# Altium PCB TC-temp-logger-base.PcbDoc (part 4 of 5)
Units mil, origin at the board's own origin, x right, y up, seen from the top; angles counter-clockwise.
Board outline 6370.08 x 6889.76 mil, 4 copper layers (Top Layer, Layer 2, Layer 1, Bottom Layer), stack 61.581 mil thick; 216 components, 163 nets, 792 pads, 3713 vias.
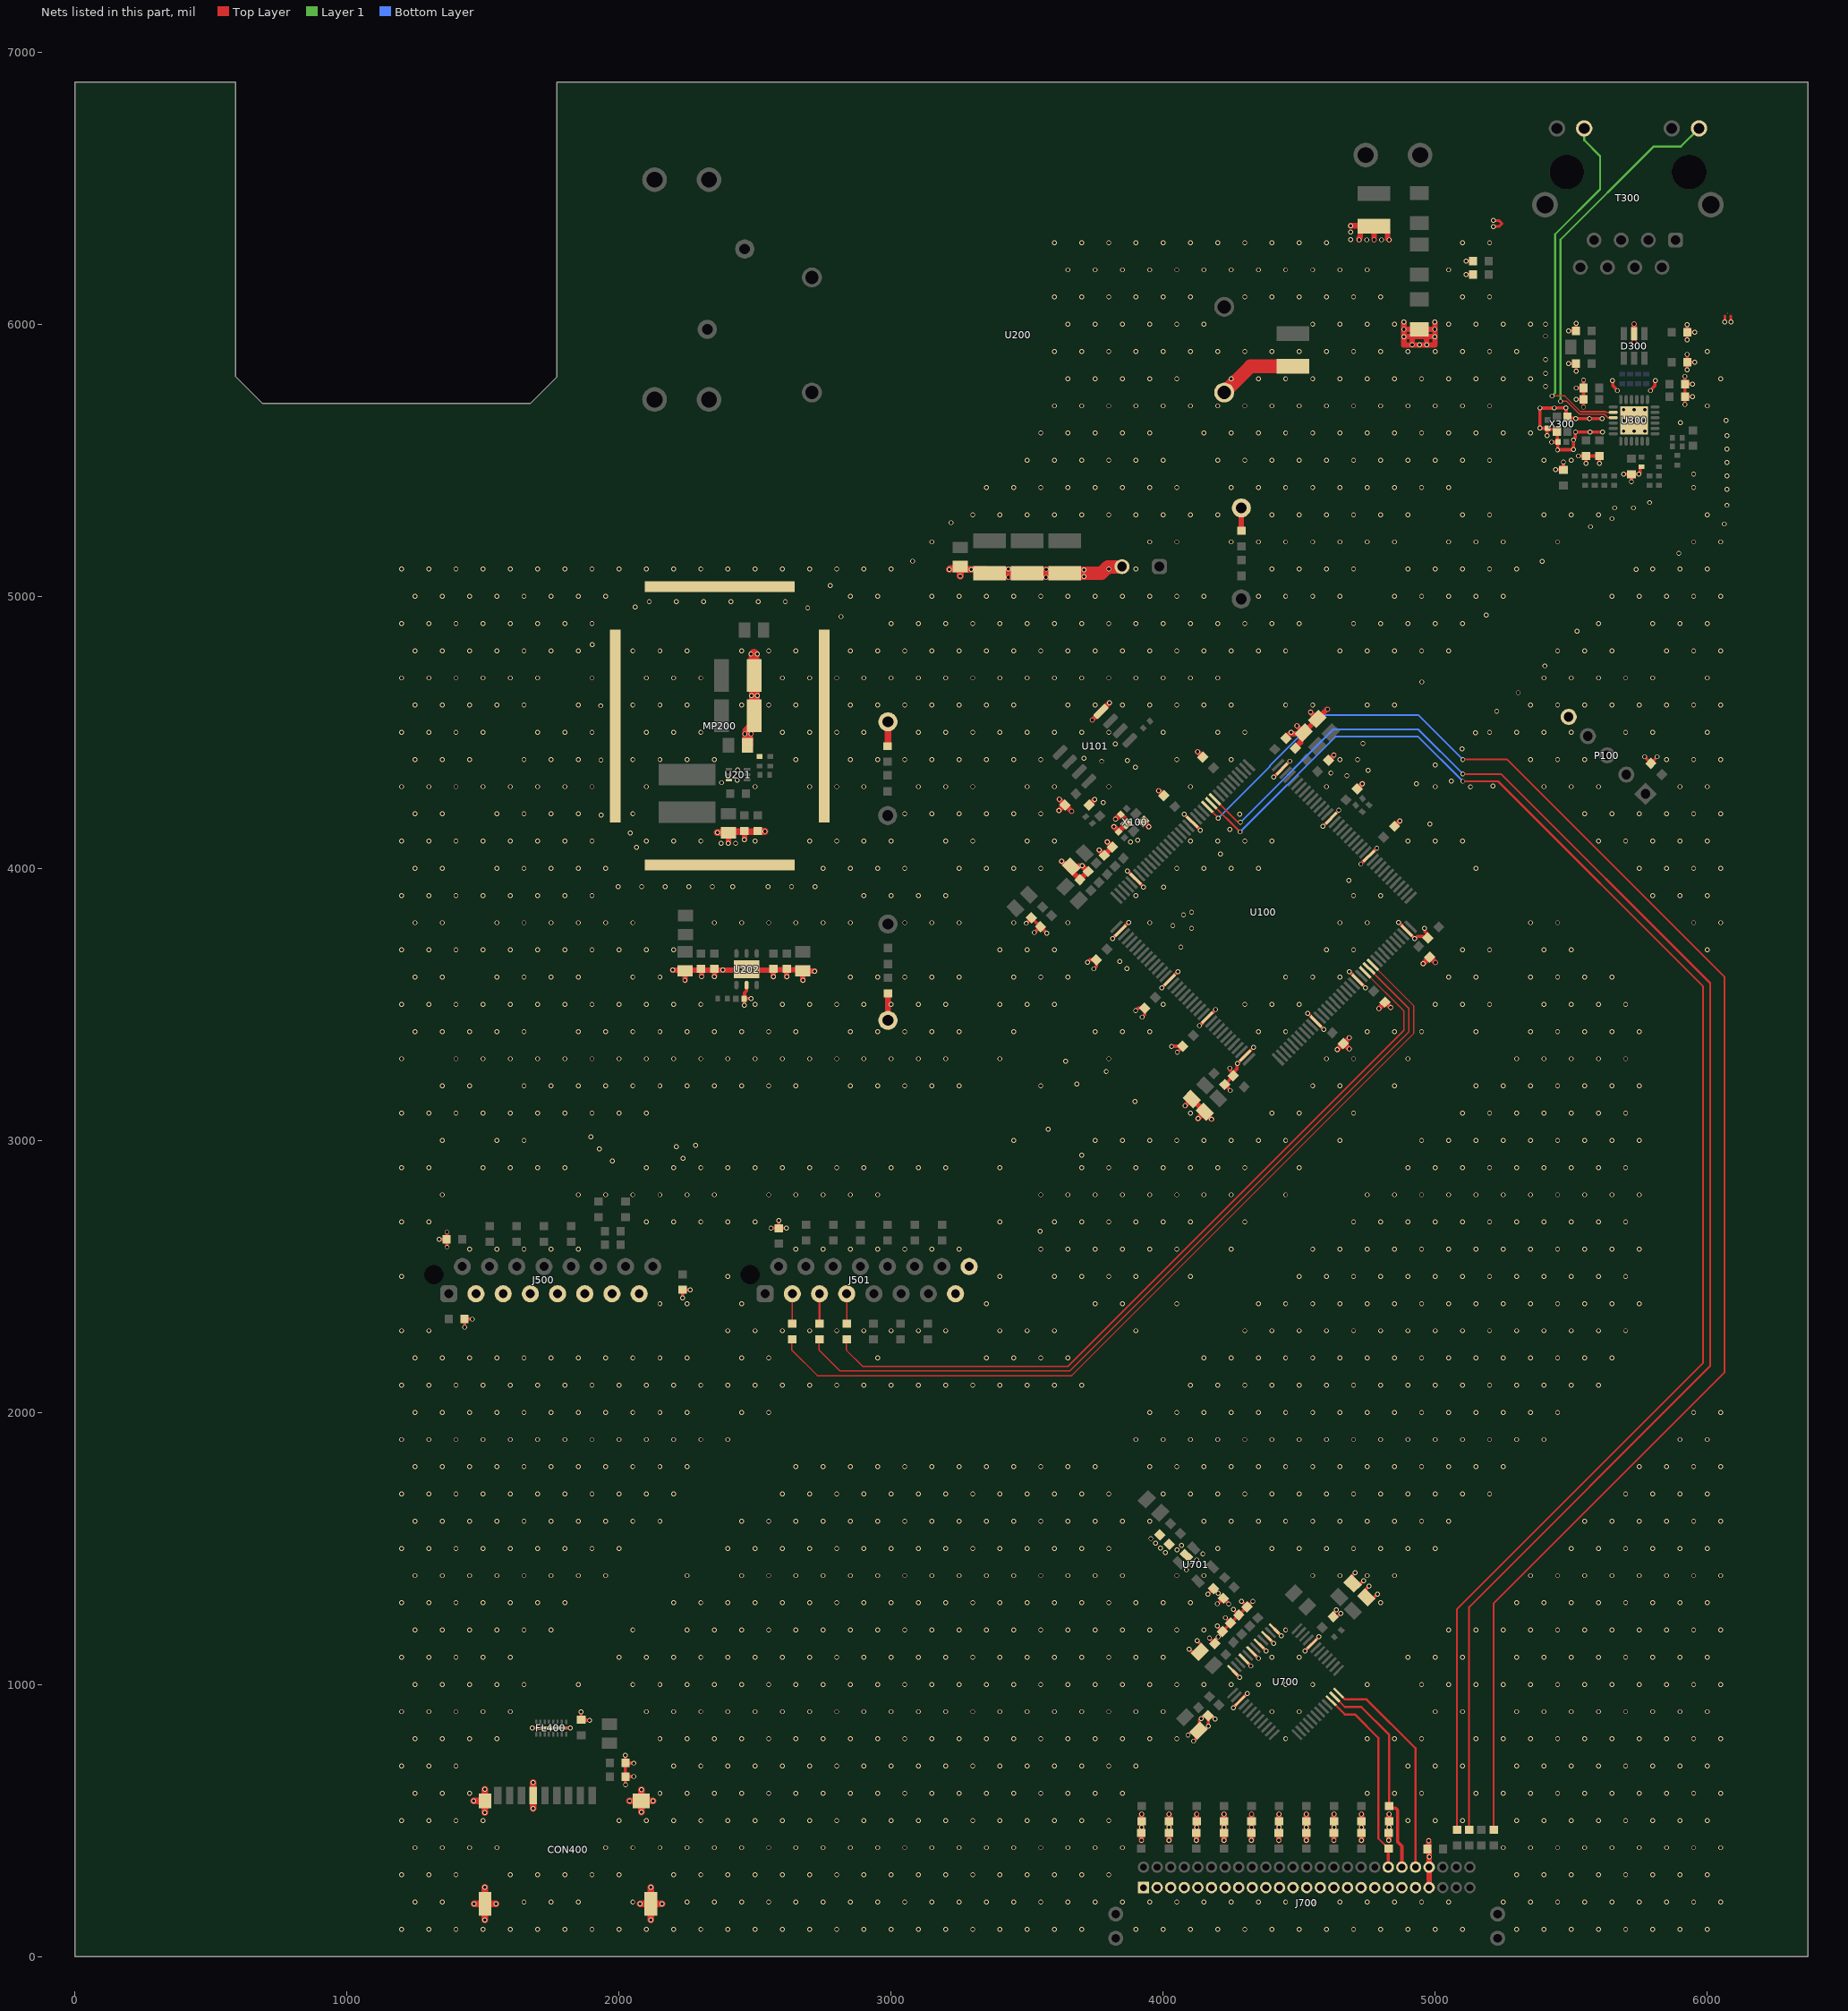
[diagram p5: the nets of this part, all layers, seen from the top]

## Via types
v1: diameter 17.72, hole 11.81, Top Layer to Bottom Layer, tented both sides, 3702 vias
v2: diameter 23.62, hole 11.81, Top Layer to Bottom Layer, 9 vias
v3: diameter 19.68, hole 7.87, Top Layer to Bottom Layer, tented both sides, 2 vias

## Nets (pads, with @x,y where several pads share a name; then routed paths per layer and width w, separated by ;. In a path a pad name is that pad's centre, name@x,y a point inside that pad or via, vN(x,y) a via of type N, cw(c..) or ccw(c..) an arc to the next point about the centre after c; other vN are vias at no path point) (continued)
CH19_7: C709.1 J700.38 U700.34 | length 721.2
  Top Layer w8: U700.34@4617.03,940.4 4667.67,889.76 4704.72,889.76 4791.34,803.15 4791.34,433.61 4827.56,397.39 C709.1@4827.56,394.54
  Top Layer w12: J700.38@4827.56,328.15 C709.1@4827.56,394.54
CH20_7: C719.1 J700.40 U700.35 | length 779.5
  Top Layer w8: U700.35@4630.95,954.32 4667.95,917.32 4728.35,917.32 4830,815.67 C719.1@4830,553.54
  Top Layer w12: C719.1@4822.89,551.18 4828.28,545.79 4854.21,545.79 4862.2,537.8 4862.2,421.26 4877.56,405.91 J700.40@4877.56,328.15
COM_7: J700.42 U700.36 | length 803.9
  Top Layer w8: U700.36@4644.87,968.24 4668.23,944.88 4748.03,944.88 4927.56,765.35 J700.42@4927.56,328.15
ENC-BUT: R516.1 U100.98 | length 3201.2
  Top Layer w5: R516.1@2634.84,2268.7 2634.84,2229.33 2728.88,2135.29 3663.69,2135.29 4921.71,3393.31 4921.71,3494.49 U100.98@4770.53,3645.66
ENC-BUT_CON_6: J501.3 R516.2 | length 110.3
  Top Layer w5: R516.2@2636.59,2325.79 J501.3@2636.59,2436.05
ENC-CH1: R514.1 U100.96 | length 2897.9
  Top Layer w5: R514.1@2834.84,2268.7 2834.84,2229.33 2894.88,2169.29 3649.61,2169.29 4884.61,3404.3 4884.61,3475.9 U100.96@4742.69,3617.82
ENC-CH1_CON_6: J501.7 R514.2 | length 110.3
  Top Layer w5: R514.2@2836.59,2325.79 J501.7@2836.59,2436.05
ENC-CH2: R515.1 U100.97 | length 3049.7
  Top Layer w5: R515.1@2734.84,2268.7 2734.84,2229.33 2811.88,2152.29 3656.65,2152.29 4903.33,3398.98 4903.33,3485.02 U100.97@4756.61,3631.74
ENC-CH2_CON_6: J501.5 R515.2 | length 111
  Top Layer w6.66: R515.2@2734.84,2325.79 2736.59,2327.53 J501.5@2736.59,2436.05
ETH_LED1_4: T300.9 U300.3 | length 1491.7
  Top Layer w5: v1(5460.63,5716.54) 5483.34,5716.54 5530.58,5669.29 5622.05,5669.29 5634.79,5656.55 U300.3@5654.53,5656.5 U300.3@5654.53,5656.5
  Layer 1 w8: v1(5460.63,5716.54) 5460.63,6311.02 5803.15,6653.54 5903.15,6653.54 T300.9@5969.69,6720.08
ETH_LED2_4: T300.11 U300.2 | length 1331.8
  Top Layer w5: v1(5429.13,5736.22) 5476.38,5736.22 5533.98,5678.62 5625.45,5678.62 5627.89,5676.18 U300.2@5654.53,5676.18
  Layer 1 w7.99: v1(5429.13,5736.22) 5440.94,5748.03 5440.94,6330.71 5606.3,6496.06 5606.3,6618.11 5547.64,6676.77 T300.11@5547.64,6720.08
GND: C100.2 C101.2 C102.2 C103.2 C104.2 C105.2 C106.2 C107.2 C108.2 C109.2 C110.2 C111.2 C112.2 C113.2 C114.2 C115.2 C116.2 C117.2 C118.2 C119.2 C120.2 C121.2 C122.2 C123.2 C124.2 C125.2 C126.2 C127.2 C128.2 C129.2 C130.2 C200.2 C201.2 C202.2 C203.2 C204.2 C206.2 C207.2 C208.2 C209.2 C210.2 C211.2 C212.2 C213.2 C214.2 C215.2 C216.2 C217.2 C218.2 C219.2 C300.2 C301.2 C302.2 C303.2 C304.2 C305.2 C306.2 C307.2 C308.2 C309.2 C310.2 C311.2 C312.2 C400.2 C401.2 C402.2 C403.2 C500.2 C501.2 C502.2 C503.2 C700.2 C701.2 C702.2 C703.2 C704.2 C705.2 C706.2 C707.2 C708.2 C709.2 C710.2 C711.2 C712.2 C713.2 C714.2 C715.2 C716.2 C717.2 C718.2 C719.2 C721.2 C722.2 C723.2 C724.2 C725.2 C726.2 C727.2 C728.2 C729.2 C730.2 C731.2 C732.2 C733.2 C734.2 C735.2 C736.2 CON400.6 CON400.10 CON400.11 CON400.12 CON400.13 D300.2 FL400.17 J500.3 J500.5 J500.7 J500.9 J500.11 J500.13 J500.15 J501.15 J501.16 J700.01 J700.03 J700.05 J700.07 J700.09 J700.11 J700.13 J700.15 J700.17 J700.19 J700.21 J700.23 J700.25 J700.27 J700.29 J700.31 J700.33 J700.35 J700.37 J700.39 J700.41 J700.43 J700.44 JP300.2 JP301.2 MP200.1 P100.5 R101.1 R200.1 R201.1 R202.1 R205.1 R310.1 R312.1 R313.1 R318.1 R321.2 TP201.1 TP203.1 TP205.1 U100.16 U100.31 U100.38 U100.51 U100.61 U100.71 U100.83 U100.94 U100.107 U100.120 U100.130 U100.143 U101.4 U200.VNEG U201.3 U202.2 U202.7 U300.25 U700.1 U700.3 U700.5 U700.7 U700.9 U700.12 U700.15 U700.44 U701.2 X100.2 X100.4 X300.2 X300.4 | length 13023.6
  Top Layer w10: v1(5213.58,6358.27) 5215.06,6359.74 5235.74,6359.74 JP301.2@5246.06,6370.07 5235.72,6380.41 5216.04,6380.41 v1@5214.57,6381.89 ; v1@6065.45,6010.33 6065.45,6030.01 ; v1@6086.12,6009.35 6086.12,6030.03
  Top Layer w12: v1(1338.58,2635.83) C501.2@1366.14,2635.83 ; v1(1367.13,2607.28) v1(1367.13,2663.39) ; C500.2@1431.1,2343.5 C500.2@1431.59,2343.01 ; v1(1432.09,2312.99) 1431.59,2313.48 C500.2@1431.59,2343.01 ; v1(1460.63,2342.52) 1460.14,2343.01 C500.2@1431.59,2343.01 ; v1(1679.96,839.57) FL400.17@1749.84,839.57 v1(1819.72,839.57) ; v1(1860.24,899.61) 1860.39,899.45 1860.39,869.96 C400.2@1860.55,869.8 1861.4,868.96 1890.89,868.96 v1(1891.73,868.11) ; v1(2022.64,740.16) 2022.64,711.26 2022.87,711.02 C401.2@2022.87,661.26 ; C402.2@2022.87,711.26 2023.19,710.94 2053.82,710.94 v1(2054.13,710.63) ; v1(2023.62,630.91) 2023.25,631.28 2023.25,658.92 2022.87,659.29 C401.2@2022.87,661.26 ; v1(2054.13,661.42) 2054.06,661.34 2022.95,661.34 C401.2@2022.87,661.26 ; v1(2233.27,2421.26) C502.2@2233.27,2450.79 v1(2261.81,2450.79) ; v1(2460.63,3496.06) 2460.24,3496.46 2460.24,3520.28 C218.2@2459.84,3520.67 ; U202.2@2468.5,3570.87 2468.5,3550.05 2460.84,3542.39 2460.84,3521.67 C218.2@2459.84,3520.67 ; v1(2485.24,3520.67) C218.2@2459.84,3520.67 ; v1(2558.07,2677.17) C503.2@2586.59,2677.17 v1(2615.16,2677.17) ; C503.2@2586.59,2677.17 v1(2586.61,2704.72) ; v1(3496.06,3798.23) 3496.32,3798.23 3515.86,3817.77 C110.2@3516.12,3817.77 3516.12,3817.66 C111.2@3548.56,3785.21 ; v1(3526.57,3763.78) 3526.85,3763.78 3548.28,3785.21 C111.2@3548.56,3785.21 ; v1(3572.83,3760.83) 3572.83,3760.94 C111.2@3548.56,3785.21 ; v1(3721.38,3654.31) 3730.72,3663.64 3750.5,3663.64 C122.2@3751.19,3662.95 ; v1(3745.09,3630.6) 3754.43,3639.93 3754.43,3659.71 C122.2@3753.73,3660.41 ; v1(3813.58,3741.97) 3813.58,3742.05 U100.38@3842.47,3770.94 ; U100.38@3842.38,3770.94 U100.38@3842.47,3770.94 ; v1(3868.77,3990.48) 3868.85,3990.48 U100.31@3898.06,3961.27 ; v1@3872.28,3800.75 U100.38@3842.47,3770.94 ; v1(3872.64,3801.03) v1(3872.64,3801.03) U100.38@3842.47,3770.94 ; U100.31@3898.06,3961.36 U100.31@3898.06,3961.27 ; v1(3898.88,3476.81) 3908.22,3486.14 3928,3486.14 C120.2@3928.69,3485.45 ; v1(3922.59,3453.1) 3931.93,3462.43 3931.93,3482.21 C120.2@3931.23,3482.91 ; v1(3928.15,3931.1) 3928.15,3931.19 U100.31@3898.06,3961.27 ; v1(3994.54,3561.02) 3994.54,3561.1 U100.51@4023.42,3589.99 ; U100.51@4023.34,3589.99 U100.51@4023.42,3589.99 ; v1(4030.51,3345.47) 4031.18,3346.14 4070.54,3346.14 C119.2@4071.23,3345.45 ; v1(4051.84,3323.51) C119.2@4071.23,3342.91 ; v1@4053.23,3619.8 U100.51@4023.42,3589.99 ; v1(4053.59,3620.07) 4053.51,3620.07 U100.51@4023.42,3589.99 ; v1(4077.37,4199.09) 4077.64,4199.09 4106.67,4170.06 U100.16@4106.85,4170.15 ; v1(4091.18,813.26) 4091.55,813.26 4108.54,830.25 C726.2@4129.75,830.25 ; v1(4095.47,1129.92) 4109.84,1115.55 4131.05,1115.55 C723.2@4135.25,1119.75 4138.38,1122.88 4138.38,1144.1 4139.85,1145.56 v1(4125,1160.43) ; U100.16@4106.85,4170.15 U100.16@4106.85,4170.15 ; v1(4111.98,791.46) 4129.75,809.23 C726.2@4129.75,830.25 ; C726.2@4132.66,834.71 4132.66,867.57 v1@4138.23,873.14 ; v1(4133.73,3421.82) 4133.73,3421.91 U100.61@4162.61,3450.79 ; v1(4136.94,4139.89) 4136.94,4139.98 U100.16@4106.85,4170.15 ; v1(4139.92,874.83) 4141.46,874.83 4151.94,885.3 4159.5,885.3 4159.99,884.82 C725.2@4164.82,884.82 4176.77,884.82 4188.87,872.71 v1(4190.42,872.71) ; U100.61@4162.53,3450.79 U100.61@4162.61,3450.79 ; v1@4164.95,1331.8 C729.2@4184.49,1351.34 ; C725.2@4165.51,884.12 4165.51,847.32 v1(4166.5,846.33) 4150.43,830.25 C726.2@4129.75,830.25 ; v1(4170.28,1170.49) 4170.28,1170.11 C724.2@4189.82,1150.57 ; C729.2@4185.25,1352.2 C730.2@4220.61,1316.84 ; C724.2@4189.82,1150.18 C724.2@4189.82,1150.57 ; v1@4192.42,3480.6 U100.61@4162.61,3450.79 ; v1(4192.78,3480.88) 4192.7,3480.88 U100.61@4162.61,3450.79 ; v1@4198.39,1214.57 C732.2@4217.93,1195.03 ; v1@4200.3,1296.45 C730.2@4219.84,1315.99 ; C730.2@4221.46,1316.07 v1@4241,1296.53 ; v1@4228.39,1244.57 C733.2@4247.93,1225.03 ; v1(4244.91,3265.58) 4246.01,3264.49 4246.01,3256.31 C109.2@4257.38,3244.94 ; v1(4246.06,3183.07) 4246.06,3184.53 4226.6,3203.99 C103.2@4226.6,3205.45 4226.6,3205.81 4257.38,3236.59 4257.38,3249.35 4271.83,3263.8 4271.83,3281.54 v1(4272.92,3282.63) 4272.92,3282.71 U100.71@4301.81,3311.6 ; U700.12@4256.08,1051.44 v1(4281.54,1026.02) ; v1@4257.67,915.1 U700.15@4282.97,940.4 ; v1@4258.39,1274.57 C734.2@4277.93,1255.03 ; U700.15@4283.29,941.36 v1(4308.7,966.82) ; v1(4288.39,1306.1) 4288.39,1305.33 4307.93,1285.79 C735.2@4307.93,1285.03 ; U700.9@4297.24,1093.2 v1(4322.7,1067.78) ; U100.71@4301.73,3311.6 U100.71@4301.81,3311.6 ; U700.7@4324.13,1121.36 U700.7@4324.73,1121.36 ; U700.7@4325.08,1121.04 v1(4350.54,1095.62) ; v1(4329.72,1305.12) 4328.87,1305.12 4308.78,1285.03 C735.2@4307.93,1285.03 ; v1(4331.98,3341.69) 4331.9,3341.69 U100.71@4301.81,3311.6 ; U700.5@4352.92,1148.88 v1@4378.34,1123.46 ; U700.3@4380.76,1176.71 v1(4406.22,1151.3) ; v1(4406.21,4334.93) 4406.29,4334.93 U100.143@4436.38,4365.02 ; v1@4406.57,4335.21 U100.143@4436.38,4365.02 ; U700.1@4407.94,1204.57 4408.62,1204.57 v1@4434.02,1179.13 ; U100.143@4436.47,4365.02 U100.143@4436.38,4365.02 ; v1(4465.27,4393.99) 4465.27,4393.9 U100.143@4436.38,4365.02 ; v1(4521.7,1123.38) U700.44@4547.12,1148.84 ; v1(4531.65,3467.13) 4531.65,3467.04 U100.83@4561.74,3436.96 ; v1@4531.93,3466.76 U100.83@4561.74,3436.96 ; U700.44@4547.44,1149.79 v1@4572.73,1175.09 ; U100.83@4561.74,3436.87 U100.83@4561.74,3436.96 ; v1(4586.57,4154.57) 4587.25,4154.57 4616.75,4184.07 U100.130@4617.42,4184.07 ; v1(4590.71,3408.07) 4590.62,3408.07 U100.83@4561.74,3436.96 ; U100.130@4633.3,4200.62 4645.63,4212.95 v1(4645.63,4213.62) ; v1(4636.81,1274.61) 4636.81,1273.06 4625.03,1261.27 C736.2@4625.03,1249.12 4625.72,1248.42 4638.12,1248.42 4638.81,1249.12 4639.41,1249.12 4651.12,1260.83 v1(4652.56,1260.83) ; v1(4684.77,3620.24) v1(4684.77,3620.24) U100.94@4714.85,3590.07 ; v1@4685.04,3619.88 U100.94@4714.85,3590.07 ; C721.2@4691.44,1395.99 v1(4705.81,1410.36) ; U100.94@4714.85,3589.99 U100.94@4714.85,3590.07 ; C721.2@4721.45,1365.98 v1(4736.32,1380.83) ; v1(4726.36,4015.48) v1(4726.36,4015.48) U100.120@4756.53,4045.57 ; v1@4726.72,4015.76 U100.120@4756.53,4045.57 ; C722.2@4742.43,1346.97 v1(4756.8,1361.34) ; v1(4743.82,3561.18) 4743.74,3561.18 U100.94@4714.85,3590.07 ; U100.120@4756.61,4045.57 U100.120@4756.53,4045.57 ; C722.2@4772.43,1316.97 v1(4787.31,1331.82) ; v1(4785.41,4074.53) v1(4785.41,4074.53) U100.120@4756.53,4045.57 ; v1(4865.72,3801.19) 4865.72,3801.11 U100.107@4895.81,3771.02 ; v1@4866,3800.83 U100.107@4895.81,3771.02 ; U100.107@4895.81,3770.94 U100.107@4895.81,3771.02 ; v1(4960.63,3779.53) 4961.72,3778.43 4961.72,3767.71 4972.95,3756.48 C127.2@4972.95,3744.09 4960.55,3744.09 4954.62,3750.02 4934.2,3750.02 4926.32,3742.14 4924.69,3742.14 U100.107@4895.81,3771.02 ; v1(5114.17,6182.87) R313.1@5139.76,6182.87 ; v1(5114.17,6232.28) 5114.17,6232.48 R312.1@5139.76,6232.48 ; v1(5384.84,5691.93) v1(5384.84,5618.11) 5385.16,5617.8 C311.2@5412.48,5617.8 ; v1@5385.33,5691.44 5385.83,5691.93 v1(5437.01,5691.93) 5437.5,5692.42 5479.82,5692.42 v1(5480.31,5692.91) ; v1(5411.53,5590.66) 5411.53,5613.24 5442.03,5613.24 X300.2@5447.54,5607.74 5449.46,5605.82 C310.2@5449.46,5569.21 ; v1(5427.13,5566.89) 5447.14,5566.89 5450.59,5563.44 5450.59,5539.17 v1@5450.3,5538.88 ; v1(5442.91,5465.55) C403.2@5470.47,5465.55 ; v1(5449.8,5538.39) v1@5450.3,5538.88 ; C403.2@5471.46,5464.57 C403.2@5470.47,5465.55 ; v1(5471.46,5494.09) 5471.46,5466.54 C403.2@5470.47,5465.55 ; v1@5479.33,5691.93 5479.75,5691.93 5481.41,5690.27 5481.41,5662.45 X300.4@5485.93,5657.93 ; X300.4@5489.22,5654.64 5489.71,5654.14 5515.64,5654.14 v1(5516.73,5653.05) ; v1(5490.39,5855.71) C301.2@5517.8,5855.71 v1(5517.8,5827.4) ; v1(5490.39,5975.71) C308.2@5517.8,5975.71 v1(5517.8,6004.02) ; v1@5514.65,5605.21 5514.65,5583.13 5507.87,5576.35 v1(5507.87,5574.8) v1(5507.87,5539.37) 5507.38,5538.88 v1@5450.3,5538.88 ; v1(5515.75,5604.33) v1(5615.16,5604.33) ; v1@5516.98,5653.3 5566.68,5653.3 v1(5566.93,5653.05) ; v1(5517.87,5723.42) C305.2@5545.28,5723.42 ; v1(5517.87,5765.71) R318.1@5545.28,5765.71 ; v1(5525.83,5515.75) C303.2@5554.13,5515.75 ; v1(5545.28,5695.12) C305.2@5545.28,5723.42 ; v1(5545.28,5794.02) R318.1@5545.28,5765.71 ; v1(5554.13,5488.35) C303.2@5554.13,5515.75 ; v1@5567.18,5653.3 5567.42,5653.05 v1(5614.17,5653.05) ; v1(5603.35,5488.35) C302.2@5603.35,5515.75 C303.2@5554.13,5515.75 ; v1(5651.57,5792.32) 5652.67,5791.23 5652.67,5774.08 5669.29,5757.45 v1(5669.29,5755.91) ; v1(5693.15,5448.82) C304.2@5721.46,5448.82 ; v1(5721.46,5421.42) C304.2@5721.46,5448.82 ; R310.1@5757.8,5476.38 5755.83,5476.38 5752.97,5473.52 5752.97,5454.55 5748.78,5450.37 v1(5748.78,5448.82) C304.2@5721.46,5448.82 ; v1(5769.69,4410.43) 5769.69,4409.45 C130.2@5792.81,4386.32 ; v1(5791.34,5755.91) 5791.34,5757.45 5807.96,5774.08 5807.96,5792.21 v1(5809.06,5793.31) ; C130.2@5792.81,4385.34 C130.2@5792.81,4386.32 ; v1(5815.94,4410.43) 5815.94,4409.45 C130.2@5792.81,4386.32 ; v1(5918.31,5704.96) C306.2@5918.31,5733.27 ; v1(5918.31,5808.7) C307.2@5918.31,5780.39 ; v1(5926.34,5832.4) C300.2@5926.34,5860.71 ; v1(5926.34,5889.02) C300.2@5926.34,5860.71 ; v1(5926.34,5942.4) C309.2@5926.34,5970.71 ; v1(5926.34,5999.02) C309.2@5926.34,5970.71 ; v1(5945.71,5733.27) C306.2@5918.31,5733.27 ; v1(5945.71,5780.39) C307.2@5918.31,5780.39 ; v1(5953.74,5860.71) C300.2@5926.34,5860.71 ; v1(5953.74,5970.71) C309.2@5926.34,5970.71 ; C724.2@4189.82,1150.57 4189.82,1162.58 4217.93,1190.69 C732.2@4217.93,1195.03 ; C732.2@4217.93,1195.03 C733.2@4247.93,1225.03 ; C733.2@4247.93,1225.03 C734.2@4277.93,1255.03 ; C734.2@4277.93,1255.03 C735.2@4307.93,1285.03 ; C305.2@5545.28,5723.42 R318.1@5545.28,5765.71 ; C306.2@5918.31,5733.27 C307.2@5918.31,5780.39
  Top Layer w20: v1(2196.85,3625.98) C214.2@2303.15,3625.98 ; v1(2242.13,3588.46) C212.2@2242.13,3623.46 ; C214.2@2301.18,3629.92 2303.15,3627.95 C214.2@2303.15,3625.98 ; v1(2303.15,3602.36) C214.2@2303.15,3625.98 ; v1(2350.39,3602.36) C213.2@2350.39,3625.98 ; C213.2@2350.39,3629.92 C213.2@2350.39,3625.98 ; v1(2401.57,4092.52) C211.2@2401.57,4130.79 C211.2@2405.77,4134.98 ; v1(2460.64,4105.74) 2460.64,4134.98 C210.2@2460.63,4137.24 ; v1(2566.93,3601.38) C215.2@2566.93,3629.92 ; v1(2616.14,3601.38) C216.2@2616.14,3626.69 ; C216.2@2616.14,3629.92 C216.2@2616.14,3626.69 ; v1(2675.2,3588.46) C217.2@2675.2,3623.46 ; v1(2718.5,3622.05) 2676.61,3622.05 C217.2@2675.2,3623.46 ; TP205.1@2988.19,3440.94 R202.1@2988.19,3540.35 ; v1(3616.14,4212.6) 3636.67,4233.13 C116.2@3638.91,4233.13 ; v1(3618.11,4253.94) 3662.4,4209.65 v1(3663.39,4209.65) ; v1(3626.2,4025.97) 3626.43,4025.97 3654.08,3998.31 C113.2@3693.91,3958.49 C112.2@3723.91,3988.49 3723.14,3988.49 v1(3702.37,4009.26) 3689.79,4009.26 3682.02,4001.49 3666.46,4001.49 C115.2@3661.87,4006.08 ; C108.2@3727.35,4232.78 3727.86,4232.78 v1(3748.03,4252.95) ; v1(3739.17,4545.28) v1(3802.17,4608.27) ; v1(3764.76,4066.93) C114.2@3783.11,4048.58 ; C114.2@3783.11,4047.69 C114.2@3783.11,4048.58 ; v1(3794.29,4097.44) 3813.11,4078.62 C129.2@3813.11,4077.69 3784,4048.58 C114.2@3783.11,4048.58 ; v1(3818.9,4153.54) 3818.9,4152.52 C125.2@3836.64,4134.77 ; v1(3824.8,4181.1) 3825.82,4181.1 3843.07,4198.36 C126.2@3843.96,4197.47 ; C125.2@3836.09,4133.88 3836.64,4134.44 C125.2@3836.64,4134.77 ; C126.2@3843.96,4197.8 C126.2@3843.96,4197.47 ; v1(3920,426.66) 3920.53,427.19 v1(3920.53,475.13) C710.2@3920.53,496.46 v1(3920.53,523.34) ; X100.4@3927.12,4173.03 3927.12,4172.29 v1(3946.85,4152.56) ; v1(3983.27,4285.43) 4001.47,4267.23 C128.2@4002.45,4267.23 ; v1(4021.05,426.66) 4021.58,427.19 v1(4021.58,475.13) C711.2@4021.58,496.46 v1(4021.58,523.34) ; C119.2@4071.23,3342.91 C119.2@4071.23,3345.45 ; v1(4080.73,3127.34) C105.2@4105.48,3152.09 ; C105.2@4105.48,3153.38 C105.2@4105.48,3152.09 ; v1(4122.11,426.66) 4122.63,427.19 v1(4122.63,475.13) C712.2@4122.63,496.46 v1(4122.63,523.34) ; v1(4125.99,4428.58) 4145.17,4409.4 C106.2@4145.17,4408.96 ; v1(4128.08,3079.99) C104.2@4152.83,3104.74 4152.83,3103.08 v1(4178.15,3077.76) ; C104.2@4152.83,3104.74 C105.2@4105.48,3152.09 ; v1(4223.16,426.66) 4223.68,427.19 v1(4223.68,475.13) C713.2@4223.68,496.46 v1(4223.68,523.34) ; R200.1@4287.4,5241.14 TP201.1@4287.4,5324.8 ; v1(4324.21,426.66) 4324.74,427.19 v1(4324.74,475.13) C714.2@4324.74,496.46 v1(4324.74,523.34) ; v1(4425.26,426.66) 4425.79,427.19 v1(4425.79,475.13) C715.2@4425.79,496.46 v1(4425.79,523.34) ; C124.2@4451.29,4480.4 v1(4470.68,4499.8) 4475.9,4494.59 4511.95,4494.59 C102.2@4516.54,4499.18 ; C100.2@4485.8,4443.9 4505.2,4463.3 4505.2,4472.28 4516.54,4483.63 C102.2@4516.54,4499.18 ; v1(4491.79,4523.93) C102.2@4516.54,4499.18 ; v1(4526.32,426.66) C706.2@4526.32,453.54 4526.32,522.81 v1(4526.84,523.34) ; v1(4541.79,4573.93) C101.2@4566.54,4549.18 ; v1(4604.33,4584.65) 4602.01,4584.65 C101.2@4566.54,4549.18 ; R101.1@4608.24,4397.02 v1(4627.42,4416.2) ; v1(4627.37,426.66) 4627.89,427.19 v1(4627.89,475.13) C717.2@4627.89,496.46 v1(4627.89,523.34) ; v1(4640.08,3333.68) 4663.1,3356.7 4663.24,3356.7 v1(4683.76,3377.22) ; C118.2@4664.5,3355.44 v1(4683.9,3336.04) ; v1(4688.98,6362.2) 4742.47,6362.2 4774.61,6362.2 C312.2@4774.61,6360.87 ; C121.2@4713.24,4292.02 v1(4732.42,4311.2) ; v1(4720.47,6310.25) 4720.47,6316.56 4724.98,6321.07 4724.98,6343.87 4741.98,6360.87 C312.2@4774.61,6360.87 ; v1(4728.42,426.66) 4728.95,427.19 v1(4728.95,475.13) C718.2@4728.95,496.46 v1(4728.95,523.34) ; v1(4775.59,6310.25) C312.2@4775.59,6360.87 ; v1(4793.31,3484.25) 4814.46,3505.41 C117.2@4814.46,3507.94 ; C117.2@4817,3507.94 v1(4836.4,3488.54) ; v1(4829.47,426.66) 4830,427.19 v1(4830,475.13) C719.2@4830,496.46 v1(4830,523.34) ; v1(4830.71,6310.25) 4824.81,6316.15 4824.81,6332.16 4824.61,6332.36 4824.61,6343.87 4807.61,6360.87 C312.2@4775.59,6360.87 ; C123.2@4850.74,4154.52 v1(4869.92,4173.7) ; 4884.84,5924.21 v1(4915.35,5924.21) ; 4884.84,5932.09 v1(4884.84,5954.72) ; v1(4884.84,6007.87) v1(4884.84,5981.3) ; v1(4955.71,3649.61) 4979.04,3672.94 C107.2@4979.46,3672.94 4981.59,3672.94 v1(5000.98,3653.54) ; v1@4976.38,426.18 v1(4976.22,426.02) 4976.22,399.76 C731.2@4971.46,395 4971.46,394.02 4977.56,387.91 J700.44@4977.56,328.15 J700.43@4977.56,253.15 ; 4999.02,5924.21 v1(4968.5,5924.21) ; 4999.02,5932.09 v1(4999.02,5954.72) ; v1(4999.02,6007.87) v1(4999.02,5981.3) ; v1(5731.3,5933.58) D300.2@5731.3,5965.55 v1(5731.3,6000.98) ; C214.2@2303.15,3625.98 C213.2@2350.39,3625.98 ; C213.2@2350.39,3625.98 v1(2381.89,3625.98) 2562.99,3625.98 C215.2@2566.93,3629.92 ; C215.2@2566.93,3629.92 2570.16,3626.69 C216.2@2616.14,3626.69 ; C216.2@2616.14,3626.69 2671.97,3626.69 C217.2@2675.2,3623.46 ; C125.2@3836.64,4134.77 3836.64,4136.84 X100.2@3864.48,4164.68 3865.87,4166.07 3865.87,4175.55 C126.2@3843.96,4197.47 ; C102.2@4516.54,4499.18 C101.2@4566.54,4549.18 ; C312.2@4774.61,6360.87 C312.2@4775.59,6360.87 ; v1(4884.84,5954.72) 4915.35,5954.72 ; v1(4884.84,5954.72) v1(4884.84,5981.3) ; v1(4884.84,5981.3) R321.2@4941.93,5981.3 ; v1(4915.35,5924.21) 4915.35,5954.72 ; v1(4915.35,5924.21) v1(4941.93,5924.21) v1(4968.5,5924.21) ; 4915.35,5954.72 4941.93,5954.72 ; 4941.93,5954.72 R321.2@4941.93,5981.3 ; 4941.93,5954.72 4968.5,5954.72 ; R321.2@4941.93,5981.3 v1(4999.02,5981.3) ; v1(4968.5,5924.21) 4968.5,5954.72 ; 4968.5,5954.72 v1(4999.02,5954.72) ; v1(4999.02,5954.72) v1(4999.02,5981.3)
  Top Layer w25: v1(1465.55,571.93) CON400.10@1506.77,571.93 ; v1(1466.54,193.9) 1506.69,193.9 CON400.12@1506.77,193.98 ; v1(1506.77,134.02) CON400.12@1506.77,193.98 ; v1(1506.77,253.94) CON400.12@1506.77,193.98 ; v1(1506.77,528.7) CON400.10@1506.77,571.93 ; v1(1506.77,615.16) CON400.10@1506.77,571.93 ; CON400.12@1506.85,193.9 v1(1547.01,193.9) ; v1(1684.06,544.29) v1(1684.06,638.78) ; v1(2038.35,571.93) CON400.11@2081.57,571.93 ; v1(2076.69,193.98) 2116.85,193.98 CON400.13@2116.93,194.06 ; v1(2081.57,530.71) CON400.11@2081.57,571.93 ; v1(2081.57,613.15) CON400.11@2081.57,571.93 ; v1(2116.93,134.09) CON400.13@2116.93,194.06 ; v1(2116.93,254.02) CON400.13@2116.93,194.06 ; CON400.13@2117.01,193.98 v1(2157.17,193.98) ; v1(2124.8,571.93) CON400.11@2081.57,571.93 ; v1@2360.23,4131.64 v1(2361.57,4131.64) 2400.72,4131.64 C211.2@2401.57,4130.79 ; C211.2@2405.77,4134.98 2460.64,4134.98 2507.58,4134.98 C209.2@2509.84,4137.24 2511.51,4135.58 v1(2535.42,4135.58) ; R201.1@2987.06,4448.96 2987.64,4449.54 2987.64,4537.95 TP203.1@2988.22,4538.53 ; v1(3213.58,5098.43) 3216.35,5101.19 3245.43,5101.19 C201.2@3253.93,5109.69 ; v1(3253.93,5074.69) C201.2@3253.93,5109.69 ; C202.2@3362.2,5084.69 3347.7,5099.19 v1(3293.93,5099.19) 3270.93,5099.19 3260.43,5109.69 C201.2@3253.93,5109.69
  Top Layer w40: C206.2@2472.02,4452.45 2473.02,4453.45 2473.02,4503.72 2497.02,4527.72 C207.2@2497.02,4560.72 C208.2@2497.02,4708.36 2496.06,4709.31 2496.06,4787.4
  Top Layer w50: C202.2@3362.2,5084.69 C204.2@3637.79,5084.69 3772.79,5084.69 3796.38,5108.28 3847.44,5108.28 C200.2@3848.42,5109.26 ; U200.VNEG@4224.41,5749.02 4320.91,5845.51 C219.2@4476.38,5845.51
  other v1: 1200,100 1300,100 1400,100 1500,100 1600,100 1700,100 1800,100 1900,100 2000,100 2100,100 2200,100 2300,100 2400,100 2500,100 2600,100 2700,100 2800,100 2900,100 3000,100 3100,100 3200,100 3300,100 3400,100 3500,100 3600,100 3700,100 3900,100 4000,100 4100,100 4200,100 4300,100 4400,100 4500,100 4600,100 4700,100 4800,100 4900,100 5000,100 5100,100 5300,100 5400,100 5500,100 5600,100 5700,100 5800,100 5900,100 6000,100 1250,200 1350,200 1650,200 1750,200 1850,200 2050,200 2250,200 2350,200 2450,200 2550,200 2650,200 2750,200 2850,200 2950,200 3050,200 3150,200 3250,200 3350,200 3450,200 3550,200 3650,200 3750,200 3850,200 3950,200 4050,200 4150,200 4250,200 4350,200 4450,200 4550,200 4650,200 4750,200 4850,200 4950,200 5050,200 5250,200 5350,200 5450,200 5550,200 5650,200 5750,200 5850,200 5950,200 6050,200 1200,300 1300,300 1400,300 1600,300 1700,300 1800,300 1900,300 2000,300 2200,300 2300,300 2400,300 2500,300 2600,300 2700,300 2800,300 2900,300 3000,300 3100,300 3200,300 3300,300 3400,300 3500,300 3600,300 3700,300 3800,300 5300,300 5400,300 5500,300 5600,300 5700,300 5800,300 5900,300 6000,300 4978.04,365.9 1250,400 1350,400 1450,400 1550,400 1950,400 2050,400 2150,400 2250,400 2350,400 2450,400 2550,400 2650,400 2750,400 2850,400 2950,400 3050,400 3150,400 3250,400 3350,400 3450,400 3550,400 3650,400 3750,400 3850,400 5250,400 5350,400 5450,400 5550,400 5650,400 5750,400 5850,400 5950,400 6050,400 4526.84,475.13 1200,500 1300,500 1400,500 1500,500 2000,500 2100,500 2200,500 2300,500 2400,500 2500,500 2600,500 2700,500 2800,500 2900,500 3000,500 3100,500 3200,500 3300,500 3400,500 3500,500 3600,500 3700,500 3800,500 4900,500 5000,500 5100,500 5300,500 5400,500 5500,500 5600,500 5700,500 5800,500 5900,500 6000,500 1250,600 1350,600 1450,600 2150,600 2250,600 2350,600 2450,600 2550,600 2650,600 2750,600 2850,600 2950,600 3050,600 3150,600 3250,600 3350,600 3450,600 3550,600 3650,600 3750,600 3850,600 4750,600 4850,600 4950,600 5150,600 5250,600 5350,600 5450,600 5550,600 5650,600 5750,600 5850,600 5950,600 6050,600 1200,700 1300,700 1400,700 2200,700 2300,700 2400,700 2500,700 2600,700 2700,700 2800,700 2900,700 3000,700 3100,700 3200,700 3300,700 3400,700 3500,700 3600,700 3700,700 3800,700 3900,700 4900,700 5000,700 5100,700 5300,700 5400,700 5500,700 5600,700 5700,700 5800,700 5900,700 6000,700 1250,800 1350,800 1450,800 1550,800 2150,800 2250,800 2350,800 2450,800 2550,800 2650,800 2750,800 2850,800 2950,800 3050,800 3150,800 3250,800 3350,800 3450,800 3550,800 3650,800 3750,800 3850,800 3950,800 4050,800 4450,800 4750,800 4850,800 4950,800 5150,800 5250,800 5350,800 5450,800 5550,800 5650,800 5750,800 5850,800 5950,800 6050,800 1200,900 1300,900 1400,900 1500,900 1600,900 2100,900 2200,900 2300,900 2400,900 2500,900 2600,900 2700,900 2800,900 2900,900 3000,900 3100,900 3200,900 3300,900 3400,900 3500,900 3600,900 3700,900 3800,900 3900,900 4000,900 4400,900 4500,900 5000,900 5100,900 5300,900 5400,900 5500,900 5600,900 5700,900 5800,900 5900,900 6000,900 4257.67,914.51 1250,1000 1350,1000 1450,1000 1550,1000 1650,1000 1850,1000 2050,1000 2150,1000 2250,1000 2350,1000 2450,1000 2550,1000 2650,1000 2750,1000 2850,1000 2950,1000 3050,1000 3150,1000 3250,1000 3350,1000 3450,1000 3550,1000 3650,1000 3750,1000 3850,1000 3950,1000 4050,1000 4150,1000 4250,1000 4350,1000 4450,1000 4550,1000 4750,1000 4950,1000 5050,1000 5150,1000 5250,1000 5350,1000 5450,1000 5550,1000 5650,1000 5750,1000 5850,1000 5950,1000 6050,1000 1200,1100 1300,1100 1400,1100 1500,1100 1600,1100 2000,1100 2100,1100 2200,1100 2300,1100 2400,1100 2500,1100 2600,1100 2700,1100 2800,1100 2900,1100 3000,1100 3100,1100 3200,1100 3300,1100 3400,1100 3500,1100 3600,1100 3700,1100 3800,1100 3900,1100 4000,1100 4400,1100 4500,1100 4900,1100 5000,1100 5100,1100 5300,1100 5400,1100 5500,1100 5600,1100 5700,1100 5800,1100 5900,1100 6000,1100 4378.38,1123.46 4202.02,1174.66 4572.73,1175.69 4434.06,1179.13 1250,1200 1350,1200 1450,1200 1550,1200 1650,1200 1750,1200 2050,1200 2250,1200 2350,1200 2450,1200 2550,1200 2650,1200 2750,1200 2850,1200 2950,1200 3050,1200 3150,1200 3250,1200 3350,1200 3450,1200 3550,1200 3650,1200 3750,1200 3850,1200 3950,1200 4050,1200 4150,1200 4450,1200 5050,1200 5150,1200 5250,1200 5350,1200 5450,1200 5550,1200 5650,1200 5750,1200 5850,1200 5950,1200 6050,1200 4198.39,1215.33 4228.39,1245.33 4258.39,1275.33 4199.53,1296.45 4241,1295.76 1200,1300 1300,1300 1400,1300 1500,1300 1600,1300 1700,1300 1800,1300 2200,1300 2300,1300 2400,1300 2500,1300 2600,1300 2700,1300 2800,1300 2900,1300 3000,1300 3100,1300 3200,1300 3300,1300 3400,1300 3500,1300 3600,1300 3700,1300 3800,1300 3900,1300 4000,1300 4100,1300 4800,1300 5300,1300 5400,1300 5500,1300 5600,1300 5700,1300 5800,1300 5900,1300 6000,1300 4164.18,1331.8 4202.87,1334.47 1250,1400 1350,1400 1450,1400 1550,1400 1650,1400 1750,1400 1850,1400 1950,1400 2250,1400 2450,1400 2550,1400 2650,1400 2750,1400 2850,1400 2950,1400 3050,1400 3150,1400 3250,1400 3350,1400 3450,1400 3550,1400 3650,1400 3750,1400 3850,1400 4050,1400 4150,1400 4550,1400 4650,1400 4750,1400 4850,1400 5350,1400 5450,1400 5550,1400 5650,1400 5750,1400 5850,1400 5950,1400 6050,1400 4085.63,1421.26 4104.33,1438.98 4123.03,1457.68 4145.67,1479.33 4007.87,1484.25 4051.18,1494.09 1200,1500 1300,1500 1400,1500 1500,1500 1600,1500 1700,1500 1800,1500 1900,1500 2000,1500 2400,1500 2500,1500 2600,1500 2700,1500 2800,1500 2900,1500 3000,1500 3100,1500 3200,1500 3300,1500 3400,1500 3500,1500 3600,1500 3700,1500 3800,1500 4200,1500 4400,1500 4500,1500 4600,1500 4700,1500 4800,1500 4900,1500 5000,1500 5500,1500 5600,1500 5700,1500 5800,1500 5900,1500 6000,1500 3990.16,1500.98 4067.91,1510.83 3972.44,1519.69 3954.72,1536.42 1250,1600 1350,1600 1450,1600 1550,1600 1650,1600 1750,1600 1850,1600 1950,1600 2050,1600 2150,1600 2450,1600 2550,1600 2650,1600 2750,1600 2850,1600 2950,1600 3050,1600 3150,1600 3250,1600 3350,1600 3450,1600 3550,1600 3650,1600 3750,1600 3850,1600 3950,1600 4150,1600 4250,1600 4350,1600 4450,1600 4550,1600 4650,1600 4750,1600 4850,1600 4950,1600 5050,1600 5550,1600 5650,1600 5750,1600 5850,1600 5950,1600 6050,1600 1200,1700 1300,1700 1400,1700 1500,1700 1600,1700 1700,1700 1800,1700 1900,1700 2000,1700 2100,1700 2200,1700 2600,1700 2700,1700 2800,1700 2900,1700 3000,1700 3100,1700 3200,1700 3300,1700 3400,1700 3500,1700 3600,1700 3700,1700 3800,1700 4000,1700 4100,1700 4200,1700 4300,1700 4400,1700 4500,1700 4600,1700 4700,1700 4800,1700 4900,1700 5000,1700 5100,1700 5200,1700 5700,1700 5800,1700 5900,1700 6000,1700 1250,1800 1350,1800 1450,1800 1550,1800 1650,1800 1750,1800 1850,1800 1950,1800 2050,1800 2150,1800 2250,1800 2650,1800 2750,1800 2850,1800 2950,1800 3050,1800 3150,1800 3250,1800 3350,1800 3450,1800 3550,1800 3650,1800 3750,1800 3950,1800 4050,1800 4150,1800 4250,1800 4350,1800 4450,1800 4550,1800 4650,1800 4750,1800 4850,1800 4950,1800 5050,1800 5150,1800 5250,1800 5750,1800 5850,1800 5950,1800 6050,1800 1200,1900 1300,1900 1400,1900 1500,1900 1600,1900 1700,1900 1800,1900 1900,1900 2000,1900 2100,1900 2200,1900 2300,1900 2400,1900 3900,1900 4000,1900 4100,1900 4200,1900 4300,1900 4400,1900 4500,1900 4600,1900 4700,1900 4800,1900 4900,1900 5000,1900 5100,1900 5200,1900 5300,1900 5400,1900 5900,1900 6000,1900 1250,2000 1350,2000 1450,2000 1550,2000 1650,2000 1750,2000 1850,2000 1950,2000 2050,2000 2150,2000 2250,2000 2450,2000 2550,2000 3950,2000 4050,2000 4150,2000 4250,2000 4350,2000 4450,2000 4550,2000 4650,2000 4750,2000 4850,2000 4950,2000 5050,2000 5150,2000 5250,2000 5350,2000 5450,2000 5950,2000 6050,2000 1200,2100 1300,2100 1400,2100 1500,2100 1600,2100 1700,2100 1800,2100 1900,2100 2000,2100 2100,2100 2200,2100 2300,2100 2400,2100 2500,2100 2600,2100 2700,2100 2800,2100 2900,2100 3000,2100 3100,2100 3200,2100 3300,2100 3400,2100 3500,2100 3600,2100 3700,2100 4100,2100 4200,2100 4300,2100 4400,2100 4500,2100 4600,2100 4700,2100 4800,2100 4900,2100 5000,2100 5100,2100 5200,2100 5300,2100 5400,2100 5500,2100 5600,2100 1250,2200 1350,2200 1450,2200 1550,2200 1650,2200 1750,2200 1850,2200 1950,2200 2050,2200 2150,2200 2250,2200 2450,2200 2550,2200 2950,2200 3350,2200 3450,2200 3550,2200 3650,2200 4150,2200 4250,2200 4350,2200 4450,2200 4550,2200 4650,2200 4750,2200 4850,2200 4950,2200 5050,2200 5150,2200 5250,2200 5350,2200 5450,2200 5550,2200 5650,2200 1200,2300 1300,2300 2400,2300 2500,2300 2600,2300 2700,2300 2800,2300 2900,2300 3000,2300 3100,2300 3200,2300 3400,2300 3500,2300 3600,2300 3900,2300 4300,2300 4400,2300 4500,2300 4600,2300 4700,2300 4800,2300 4900,2300 5000,2300 5100,2300 5200,2300 5300,2300 5400,2300 5500,2300 5600,2300 5700,2300 2150,2400 2250,2400 2450,2400 3350,2400 3750,2400 3850,2400 4050,2400 4350,2400 4450,2400 4550,2400 4650,2400 4750,2400 4850,2400 4950,2400 5050,2400 5150,2400 5250,2400 5350,2400 5450,2400 5550,2400 5650,2400 5750,2400 1200,2500 2400,2500 3400,2500 3600,2500 3700,2500 3800,2500 3900,2500 4100,2500 4500,2500 4600,2500 4700,2500 4800,2500 4900,2500 5000,2500 5100,2500 5200,2500 5300,2500 5400,2500 5500,2500 5600,2500 5700,2500 1450,2600 1550,2600 1650,2600 1750,2600 1850,2600 2650,2600 2750,2600 2850,2600 2950,2600 3050,2600 3150,2600 3250,2600 3550,2600 3650,2600 3750,2600 3850,2600 3950,2600 4050,2600 4250,2600 4550,2600 4650,2600 4750,2600 4850,2600 4950,2600 5050,2600 5150,2600 5250,2600 5350,2600 5450,2600 5550,2600 5650,2600 5750,2600 3547.24,2665.35 1200,2700 1300,2700 2100,2700 2200,2700 2300,2700 2400,2700 2500,2700 3400,2700 3600,2700 3700,2700 3800,2700 3900,2700 4000,2700 4100,2700 4300,2700 4700,2700 4800,2700 4900,2700 5000,2700 5100,2700 5200,2700 5300,2700 5400,2700 5500,2700 5600,2700 5700,2700 1350,2800 1850,2800 1950,2800 2050,2800 2150,2800 2250,2800 2350,2800 2550,2800 2650,2800 2750,2800 2850,2800 2950,2800 3550,2800 3650,2800 3750,2800 3850,2800 3950,2800 4050,2800 4150,2800 4250,2800 4450,2800 4750,2800 4850,2800 4950,2800 5050,2800 5150,2800 5250,2800 5350,2800 5450,2800 5550,2800 5650,2800 5750,2800 1200,2900 1300,2900 1500,2900 1600,2900 1700,2900 1800,2900 2100,2900 2200,2900 2300,2900 2400,2900 2500,2900 2600,2900 2700,2900 2800,2900 2900,2900 3000,2900 3100,2900 3200,2900 3400,2900 3700,2900 3800,2900 3900,2900 4000,2900 4100,2900 4200,2900 4300,2900 4500,2900 4900,2900 5000,2900 5100,2900 5200,2900 5300,2900 5400,2900 5500,2900 5600,2900 5700,2900 1975.39,2924.21 2235.24,2934.06 3700.79,2945.87 1927.17,2968.5 2210.63,2977.36 2280.51,2981.3 1350,3000 1550,3000 1650,3000 3450,3000 3750,3000 3850,3000 3950,3000 4050,3000 4150,3000 4250,3000 4350,3000 4450,3000 4650,3000 4950,3000 5050,3000 5150,3000 5250,3000 5350,3000 5450,3000 5550,3000 5650,3000 5750,3000 1895.67,3012.8 3576.77,3041.34 1200,3100 1300,3100 1400,3100 1500,3100 1600,3100 1700,3100 1800,3100 1900,3100 2000,3100 2100,3100 4100,3100 4400,3100 4500,3100 4700,3100 5100,3100 5200,3100 5300,3100 5400,3100 5500,3100 5600,3100 5700,3100 3895.67,3142.72 1350,3200 1450,3200 1650,3200 1750,3200 1850,3200 1950,3200 2050,3200 2150,3200 2250,3200 2350,3200 2450,3200 2550,3200 2650,3200 2850,3200 2950,3200 3050,3200 3150,3200 3250,3200 3550,3200 4550,3200 4650,3200 4850,3200 5150,3200 5250,3200 5350,3200 5450,3200 5550,3200 5650,3200 5750,3200 3683.07,3206.69 3790.35,3252.95 3641.73,3291.34 1200,3300 1400,3300 1500,3300 1600,3300 1700,3300 1800,3300 1900,3300 2000,3300 2100,3300 2200,3300 2300,3300 2400,3300 2500,3300 2600,3300 2700,3300 2800,3300 2900,3300 3000,3300 3100,3300 3200,3300 3400,3300 3800,3300 4600,3300 4700,3300 4900,3300 5300,3300 5400,3300 5500,3300 5600,3300 5700,3300 1250,3400 1350,3400 1450,3400 1550,3400 1650,3400 1850,3400 1950,3400 2050,3400 2150,3400 2250,3400 2350,3400 2450,3400 2550,3400 2650,3400 2850,3400 2950,3400 3050,3400 3150,3400 3250,3400 3450,3400 3750,3400 3850,3400 3950,3400 4350,3400 4450,3400 4750,3400 4850,3400 4950,3400 5150,3400 5350,3400 5450,3400 5550,3400 5650,3400 5750,3400 1200,3500 1300,3500 1400,3500 1500,3500 1600,3500 1700,3500 1800,3500 1900,3500 2000,3500 2100,3500 2200,3500 2300,3500 2500,3500 2600,3500 2700,3500 2800,3500 2900,3500 3000,3500 3100,3500 3200,3500 3400,3500 3500,3500 3600,3500 4000,3500 4300,3500 4400,3500 4500,3500 5000,3500 5100,3500 5200,3500 5400,3500 5500,3500 5600,3500 5700,3500 1250,3600 1350,3600 1550,3600 1650,3600 1750,3600 1850,3600 2050,3600 2150,3600 2850,3600 2950,3600 3050,3600 3150,3600 3250,3600 3450,3600 3550,3600 3650,3600 4450,3600 4550,3600 4650,3600 5050,3600 5150,3600 5350,3600 5450,3600 5550,3600 5650,3600 3866.22,3631.09 3840.07,3657.69 1200,3700 1300,3700 1400,3700 1500,3700 1600,3700 1700,3700 1800,3700 1900,3700 2000,3700 2100,3700 2200,3700 3400,3700 3500,3700 3600,3700 4600,3700 4700,3700 5100,3700 5200,3700 5400,3700 5500,3700 6000,3700 4064.96,3710.63 4924.77,3742.14 4104.33,3779.53 4035.43,3789.37 1250,3800 1350,3800 1550,3800 1650,3800 1750,3800 1850,3800 1950,3800 2050,3800 2350,3800 2450,3800 2550,3800 2650,3800 2750,3800 2850,3800 3050,3800 3150,3800 3250,3800 3450,3800 3650,3800 3950,3800 4650,3800 4750,3800 5350,3800 5450,3800 5950,3800 6050,3800 4074.8,3828.74 4104.33,3838.58 1200,3900 1300,3900 1400,3900 1500,3900 1600,3900 1700,3900 1800,3900 1900,3900 2900,3900 3000,3900 3100,3900 3200,3900 3900,3900 4700,3900 4800,3900 5800,3900 5900,3900 6000,3900 4002.02,3930.63 1996.06,3933.07 2082.68,3933.07 2169.29,3933.07 2255.91,3933.07 2342.52,3933.07 2417.32,3933.07 2547.24,3933.07 2633.86,3933.07 2720.47,3933.07 4682.8,3955.86 1250,4000 1350,4000 1550,4000 1650,4000 1750,4000 1850,4000 1950,4000 2750,4000 2850,4000 2950,4000 3050,4000 3250,4000 3350,4000 3450,4000 3550,4000 4050,4000 4150,4000 4250,4000 4350,4000 5150,4000 5750,4000 5850,4000 5950,4000 6050,4000 4210.63,4052.17 2063.93,4076.75 2375,4092.52 2428.15,4092.52 3879.92,4097.44 1200,4100 1300,4100 1400,4100 1500,4100 1600,4100 1700,4100 1800,4100 1900,4100 2100,4100 2200,4100 2300,4100 2500,4100 2700,4100 2800,4100 2900,4100 3000,4100 3200,4100 3300,4100 3500,4100 3600,4100 4100,4100 4200,4100 4300,4100 4400,4100 4900,4100 5000,4100 5100,4100 5600,4100 5700,4100 5800,4100 5900,4100 6000,4100 3906.5,4103.35 2041.07,4129.25 4244.65,4143.17 4980.31,4163.39 1934.36,4195.83 4281.62,4198.49 1250,4200 1350,4200 1550,4200 1650,4200 1750,4200 1850,4200 2050,4200 3050,4200 3150,4200 3250,4200 3350,4200 3450,4200 3550,4200 5550,4200 5650,4200 5750,4200 5850,4200 5950,4200 6050,4200 3779.53,4242.13 5129.35,4299.34 1200,4300 1300,4300 1400,4300 1500,4300 1600,4300 1700,4300 1800,4300 1900,4300 2100,4300 2500,4300 2700,4300 2800,4300 2900,4300 3100,4300 3200,4300 3300,4300 3500,4300 3600,4300 3800,4300 4100,4300 4600,4300 5000,4300 5400,4300 5500,4300 5600,4300 5900,4300 6000,4300 5211.73,4302.77 4931.1,4311.02 2376.97,4314.96 5059.06,4320.87 2434.06,4323.82 4675.2,4340.55 4616.14,4350.39 4753.94,4360.24 2435.04,4362.2 3897.64,4371.06 5000,4379.92 3773.62,4393.7 3868.11,4396.65 1933.07,4397.64 1250,4400 1350,4400 1450,4400 1650,4400 1750,4400 1850,4400 2050,4400 2150,4400 2250,4400 2350,4400 2650,4400 2850,4400 2950,4400 3050,4400 3150,4400 3250,4400 3350,4400 3450,4400 3550,4400 4050,4400 4250,4400 4650,4400 4714.57,4399.61 5350,4400 5450,4400 5550,4400 5850,4400 5950,4400 6050,4400 3708.66,4404.53 5098.43,4438.98 3823.82,4456.69 4734.25,4458.66 2461.61,4494.09 2484.25,4494.09 5147.64,4498.03 1200,4500 1300,4500 1400,4500 1500,4500 1700,4500 1800,4500 1900,4500 2100,4500 2200,4500 2300,4500 2600,4500 2700,4500 2800,4500 2900,4500 3100,4500 3200,4500 3300,4500 3400,4500 3500,4500 3600,4500 3700,4500 3800,4500 4000,4500 4200,4500 4300,4500 5200,4500 5300,4500 5400,4500 5500,4500 5700,4500 5800,4500 6000,4500 5226.38,4576.77 1932.69,4597.69 1250,4600 1350,4600 1450,4600 1550,4600 1650,4600 1850,4600 2050,4600 2150,4600 2250,4600 2450,4600 2550,4600 2650,4600 2850,4600 2950,4600 3050,4600 3150,4600 3250,4600 3350,4600 3450,4600 3650,4600 3750,4600 3850,4600 3950,4600 4050,4600 4150,4600 4250,4600 4450,4600 4550,4600 4750,4600 4850,4600 5350,4600 5450,4600 5550,4600 5650,4600 5750,4600 5850,4600 5950,4600 6050,4600 2486.22,4634.84 2507.87,4634.84 5305.12,4645.67 4950.79,4685.04 1200,4700 1300,4700 1400,4700 1500,4700 1600,4700 1700,4700 1900,4700 2100,4700 2200,4700 2300,4700 2600,4700 2700,4700 2800,4700 2900,4700 3000,4700 3100,4700 3200,4700 3300,4700 3400,4700 3500,4700 3600,4700 3700,4700 3800,4700 3900,4700 4000,4700 4100,4700 4200,4700 5400,4700 5500,4700 5600,4700 5700,4700 5800,4700 6000,4700 5403.54,4744.09 2484.25,4787.4 2507.87,4787.4 1250,4800 1350,4800 1450,4800 1550,4800 1650,4800 1750,4800 1850,4800 2050,4800 2150,4800 2250,4800 2450,4800 2550,4800 2650,4800 2850,4800 2950,4800 3050,4800 3150,4800 3250,4800 3350,4800 3450,4800 3550,4800 3650,4800 3750,4800 3850,4800 3950,4800 4050,4800 4150,4800 4250,4800 4350,4800 4450,4800 4650,4800 4750,4800 4850,4800 4950,4800 5050,4800 5450,4800 5550,4800 5650,4800 5850,4800 5950,4800 6050,4800 1901.57,4822.83 5521.65,4872.05 1200,4900 1300,4900 1400,4900 1500,4900 1600,4900 1700,4900 1800,4900 1900,4900 3000,4900 3100,4900 3200,4900 3300,4900 3400,4900 3500,4900 3600,4900 3700,4900 3800,4900 3900,4900 4000,4900 4100,4900 4200,4900 4300,4900 4400,4900 4500,4900 4700,4900 4800,4900 4900,4900 5000,4900 5100,4900 5600,4900 5800,4900 5900,4900 6000,4900 2814.96,4925.2 5187.01,4931.1 2692.91,4956.69 2059.06,4960.63 2110.63,4980.31 2210.63,4980.31 2310.63,4980.31 2410.63,4980.31 2510.63,4980.31 2610.63,4980.31 1250,5000 1350,5000 1450,5000 1550,5000 1650,5000 1750,5000 1850,5000 1950,5000 2850,5000 2950,5000 3150,5000 3250,5000 3350,5000 3450,5000 3550,5000 3650,5000 3750,5000 3850,5000 3950,5000 4050,5000 4150,5000 4350,5000 4450,5000 4550,5000 4650,5000 4850,5000 4950,5000 5050,5000 5150,5000 5250,5000 5650,5000 5750,5000 5850,5000 5950,5000 6050,5000 2775.59,5039.37 3430.12,5069.88 3568.9,5069.88 3708.66,5071.85 3708.66,5097.44 5738.19,5098.43 3569.88,5099.41 1200,5100 1300,5100 1400,5100 1500,5100 1600,5100 1700,5100 1800,5100 1900,5100 2000,5100 2100,5100 2200,5100 2300,5100 2400,5100 2500,5100 2600,5100 2700,5100 2800,5100 2900,5100 3000,5100 3431.1,5100.39 3800,5100 3900,5100 4400,5100 4500,5100 4600,5100 4700,5100 4900,5100 5000,5100 5100,5100 5200,5100 5300,5100 5800,5100 5900,5100 6000,5100 5393.7,5127.95 3079.29,5129.29 5895.67,5157.48 3150,5200 3950,5200 4050,5200 4250,5200 4350,5200 4450,5200 4550,5200 4650,5200 4750,5200 4850,5200 5050,5200 5150,5200 5250,5200 5450,5200 5950,5200 6050,5200 5570.87,5255.91 6062.99,5265.75 3220.71,5270.71 5649.61,5285.43 3300,5300 3400,5300 3500,5300 3600,5300 3700,5300 3800,5300 3900,5300 4000,5300 4100,5300 4200,5300 4400,5300 4500,5300 4600,5300 4700,5300 4800,5300 4900,5300 5100,5300 5200,5300 5400,5300 5500,5300 5600,5300 6000,5300 5659.45,5324.8 5728.35,5324.8 6072.83,5334.65 5787.4,5344.49 6072.83,5393.7 3350,5400 3450,5400 3550,5400 3650,5400 3750,5400 3850,5400 3950,5400 4050,5400 4250,5400 4350,5400 4450,5400 4550,5400 4650,5400 4750,5400 4850,5400 4950,5400 5050,5400 5950,5400 6072.83,5442.91 5950,5449.21 6072.83,5492.13 3500,5500 3600,5500 3700,5500 3800,5500 3900,5500 4000,5500 4200,5500 4300,5500 4400,5500 4500,5500 4600,5500 4700,5500 4800,5500 4900,5500 5000,5500 5100,5500 5200,5500 5400,5500 5500,5500 6072.83,5541.34 6072.83,5590.55 3550,5600 3650,5600 3750,5600 3850,5600 3950,5600 4150,5600 4250,5600 4350,5600 4450,5600 4550,5600 4650,5600 4750,5600 4850,5600 4950,5600 5050,5600 5150,5600 5250,5600 5350,5600 5568.9,5604.33 5901.57,5638.78 6068.9,5646.65 3600,5700 3700,5700 3800,5700 3900,5700 4000,5700 4100,5700 4200,5700 4300,5700 4400,5700 4500,5700 4600,5700 4700,5700 4800,5700 4900,5700 5000,5700 5100,5700 5200,5700 6000,5700 5405.51,5771.65 3650,5800 3750,5800 3850,5800 3950,5800 4050,5800 4250,5800 4350,5800 4450,5800 4550,5800 4650,5800 4750,5800 4850,5800 4950,5800 5050,5800 5150,5800 5250,5800 5350,5800 6050,5800 5405.51,5818.9 5405.51,5870.08 3600,5900 3700,5900 3800,5900 3900,5900 4000,5900 4100,5900 4200,5900 4300,5900 4400,5900 4500,5900 4600,5900 4700,5900 4800,5900 4900,5900 5000,5900 5100,5900 5200,5900 5300,5900 6000,5900 5405.51,5956.69 3650,6000 3750,6000 3850,6000 3950,6000 4050,6000 4150,6000 4550,6000 4650,6000 4750,6000 4850,6000 5050,6000 5150,6000 5250,6000 5350,6000 5405.51,6000 6063.97,6007.87 6087.59,6007.87 3600,6100 3700,6100 3800,6100 3900,6100 4000,6100 4100,6100 4300,6100 4400,6100 4500,6100 4600,6100 4700,6100 4800,6100 5100,6100 5200,6100 3650,6200 3750,6200 3850,6200 3950,6200 4050,6200 4150,6200 4250,6200 4350,6200 4450,6200 4550,6200 4650,6200 4750,6200 5050,6200 3600,6300 3700,6300 3800,6300 3900,6300 4000,6300 4100,6300 4200,6300 4300,6300 4400,6300 4500,6300 4600,6300 5100,6300 5200,6300 4748.03,6310.25 4803.15,6310.25 4688.98,6311.02 4688.98,6338.58 5213.58,6381.89
  other v2: 5691.93,5607.28 5731.3,5607.28 5770.67,5607.28 5691.93,5646.65 5731.3,5646.65 5770.67,5646.65 5691.93,5686.02 5731.3,5686.02 5770.67,5686.02
  other v3: 2446.85,3628.94 2490.16,3628.94
HW_ID0: R702.2 U100.10 | length 5863.4
  Top Layer w6.66: U100.10@4190.37,4253.66 4272.97,4171.07 4281.69,4171.07 v1(4283.81,4168.95) ; v1(5101.38,4346.54) 5242.34,4346.54 6010.91,3577.97 6010.91,2170.06 5125,1284.15 R702.2@5125,465
  Bottom Layer w6.66: v1(4283.81,4168.95) 4625.51,4510.66 4937.26,4510.66 v1(5101.38,4346.54)
HW_ID1: R703.2 U100.11 | length 5853
  Top Layer w6.66: U100.11@4176.45,4239.74 U100.11@4176.45,4239.74 4282.41,4133.86 v1(4282.48,4133.86) ; R703.2@5080,465 5080,1276.85 5984.25,2181.1 5984.25,3566.93 5231.3,4319.88 v1(5101.38,4319.88)
  Bottom Layer w6.66: v1(4282.48,4133.86) 4632.62,4484 4937.26,4484 v1(5101.38,4319.88)
HW_ID2: R704.2 U100.12 | length 5966.5
  Top Layer w6.66: U100.12@4162.53,4225.83 4162.53,4224.34 4201.71,4185.15 v1(4201.71,4183.67) ; v1(5101.38,4399.86) 5264.43,4399.86 6064.23,3600.06 6064.23,2147.97 5215,1298.74 R704.2@5215,465
  Bottom Layer w6.66: v1(4201.71,4183.67) 4391.77,4373.72 4391.77,4377.08 4578.67,4563.98 4937.26,4563.98 v1(5101.38,4399.86)

## Text inside footprints (layer, text, board x,y; h text height)
C200: Top Overlay "+" at 4096.45,5079.73 h59.06
J700: Mechanical 13 "PCB Edge" at 3753.94,-6.69 h32 r180
MP200: Assembly Notes "recommended tin paste thickness=0.5mm / customer to define the final stencil gap" at 1893.7,4726.38 h15.75 r270